# EAGLE board square Rev1 (EAGLE 9.0.1)
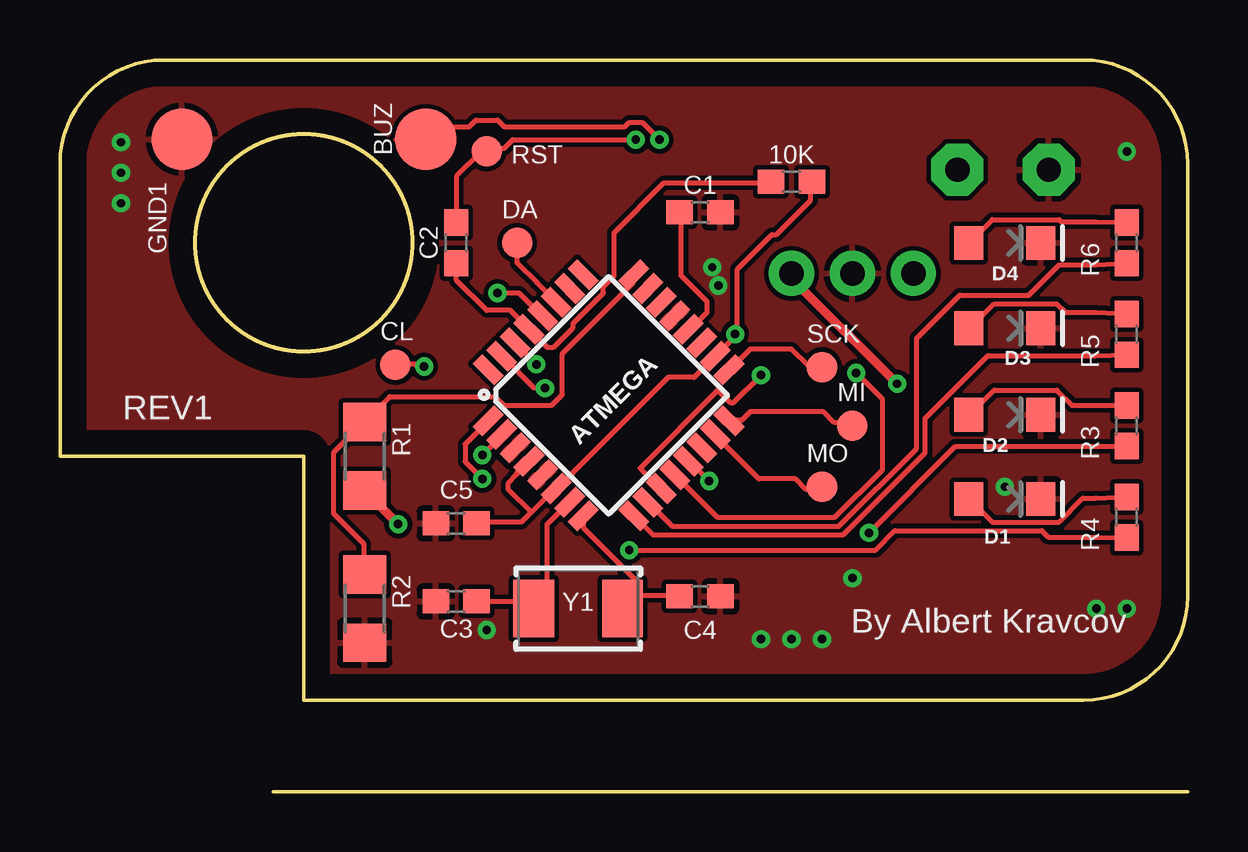
[diagram p0: board, top side]
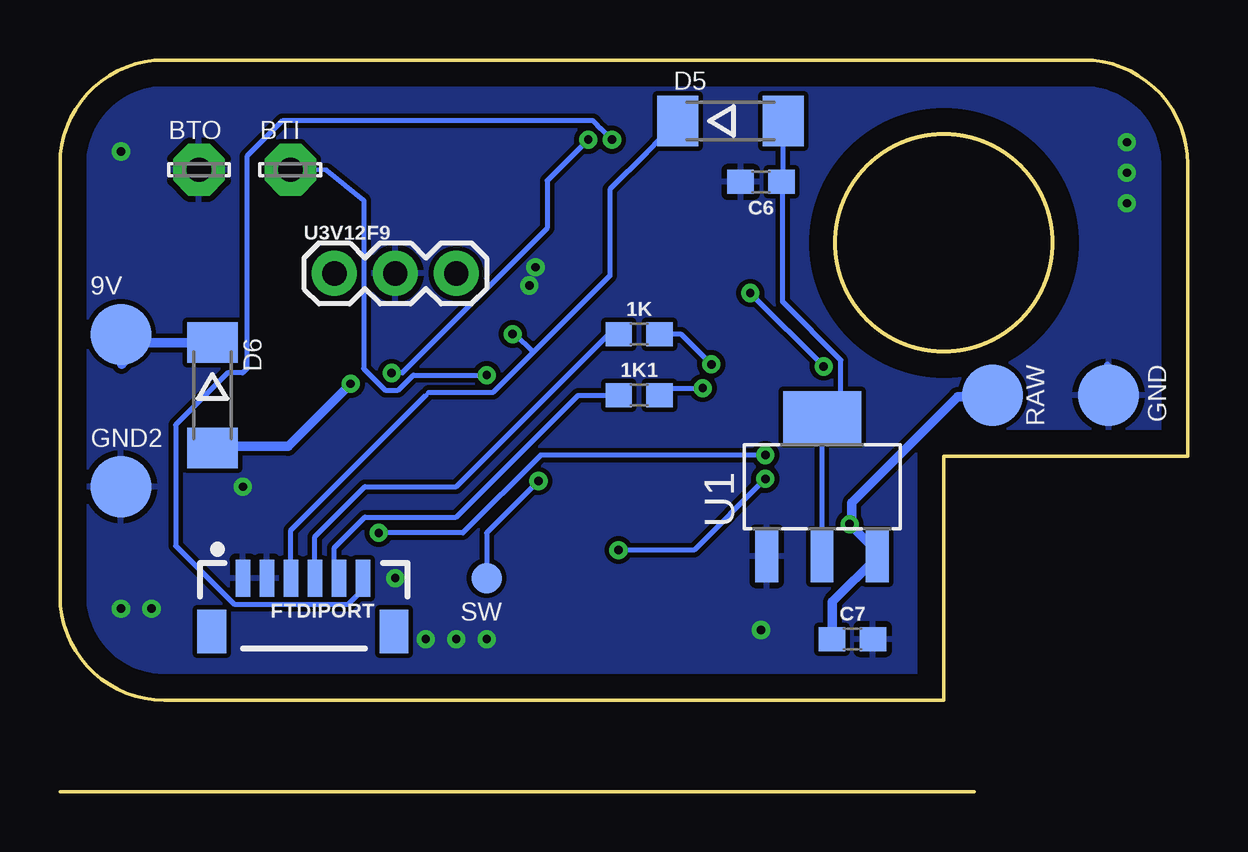
[diagram p1: board, bottom side, seen from below]

Size 46.99 x 30.48 mm. Coordinates in mm from the lower left corner, seen from the top.
Outline: 0,13.97 0,26.14 arc-90 4.34,30.48 42.65,30.48 arc-90 46.99,26.14 46.99,8.15 arc-90 42.65,3.81 10.16,3.81 10.16,13.97 0,13.97
Outline: circle at 10.16,22.86 radius 4.52
Copper layers (1*16): Top 0.035mm / dielectric 1.5mm / Bottom 0.035mm
Design rules "default *": minimum track width 6mil, minimum drill 0.35mm, track to track 6mil, track to pad 6mil, pad to pad 6mil, via to via 6mil, smd to smd 6mil, copper to edge 40mil, drill to drill 6mil, minimum pad ring 10mil, minimum via ring 8mil, stop-mask expansion 4mil, vias tented up to drill 2mm, thermal gap 10mil
Net classes: 0 default: width 0.2 mm, drill 0.254 mm, clearance 0.16 mm; 1 power: width 0.2 mm, drill 0.254 mm, clearance 0.2 mm; 2 9v: width 0.4 mm, drill 0.254 mm, clearance 0.3 mm

## Footprints (pad centres in the part's own frame; a part is rotated, then mirrored left to right if it is on the bottom)
0603 = smd 1.1 x 1: 1 -0.85,0; 2 0.85,0
B2,54 = smd 2.54 x 2.54: TP 0,0
TQFP32-08 = smd 1.27 x 0.559: 1 -4.293,2.8; 2 -4.293,2; 3 -4.293,1.2; 4 -4.293,0.4; 5 -4.293,-0.4; 6 -4.293,-1.2; 7 -4.293,-2; 8 -4.293,-2.8; 17 4.293,-2.8; 18 4.293,-2; 19 4.293,-1.2; 20 4.293,-0.4; 21 4.293,0.4; 22 4.293,1.2; 23 4.293,2; 24 4.293,2.8 | smd 0.559 x 1.27: 9 -2.8,-4.293; 10 -2,-4.293; 11 -1.2,-4.293; 12 -0.4,-4.293; 13 0.4,-4.293; 14 1.2,-4.293; 15 2,-4.293; 16 2.8,-4.293; 25 2.8,4.293; 26 2,4.293; 27 1.2,4.293; 28 0.4,4.293; 29 -0.4,4.293; 30 -1.2,4.293; 31 -2,4.293; 32 -2.8,4.293
LSP10 = drill 1.016 pad 2.159 octagon: MP 0,0
B1,27 = smd 1.27 x 1.27: TP 0,0
LED-1206 = smd 1.2 x 1.4: A -1.5,0; C 1.5,0
SOD106A-R = smd 1.7 x 2.1: A 2.2,0; C -2.2,0
1X06-1MM = smd 0.6 x 1.55: 1 -2.54,1.27; 2 -1.54,1.27; 3 -0.54,1.27; 4 0.46,1.27; 5 1.46,1.27; 6 2.46,1.27 | smd 1.2 x 1.8: P$1 -3.84,-0.955; P$2 3.76,-0.955
R1206 = smd 1.6 x 1.803: 1 -1.422,0; 2 1.422,0
SOT223 = smd 0.95 x 2.15: 1 -2.3,-2.9; 2 0,-2.9; 3 2.3,-2.9 | smd 3.25 x 2.15: 4 0,2.9
1X03 = drill 1.016 pad 1.88: 1 0,0; 2 2.54,0; 3 5.08,0
CRYSTAL-SMD-5X3.2-2PAD = smd 1.7 x 2.4: P$1 1.85,0; P$2 -1.85,0

## Placement (x,y rotation side)
1K  [0603]  22.86,19.05 0 bottom
1K1  [0603]  22.86,16.51 0 bottom
9V  TPB2,54  [B2,54]  44.45,19.05 0 bottom
10K  [0603]  30.48,25.4 0 top
ATMEGA  ATMEGA328P_TQFP  [TQFP32-08]  22.86,16.51 45 top
BTI  LSP10  [LSP10]  37.39,25.91 0 bottom
BTO  LSP10  [LSP10]  41.2,25.91 0 bottom
BUZ  TPB2,54  [B2,54]  15.24,27.18 90 top
C1  100nF  [0603]  26.67,24.13 0 top
C2  0.1uF  [0603]  16.51,22.86 90 top
C3  18pF  [0603]  16.51,7.92 180 top
C4  18pF  [0603]  26.67,8.13 0 top
C5  100nF  [0603]  16.51,11.18 180 top
C6  18pF  [0603]  17.78,25.4 180 bottom
C7  18pF  [0603]  13.97,6.35 0 bottom
CL  TPB1,27  [B1,27]  13.97,17.78 0 top
D1  [LED-1206]  39.37,12.19 0 top
D2  [LED-1206]  39.37,15.7 0 top
D3  [LED-1206]  39.37,19.3 0 top
D4  [LED-1206]  39.37,22.86 0 top
D5  [SOD106A-R]  19.05,27.94 0 bottom
D6  [SOD106A-R]  40.64,16.51 270 bottom
DA  TPB1,27  [B1,27]  19.05,22.86 0 top
FTDIPORT  [1X06-1MM]  36.83,7.62 0 bottom
GND  TPB2,54  [B2,54]  3.3,16.51 0 bottom
GND1  TPB2,54  [B2,54]  5.08,27.18 180 top
GND2  TPB2,54  [B2,54]  44.45,12.7 0 bottom
MI  TPB1,27  [B1,27]  33.02,15.24 0 top
MO  TPB1,27  [B1,27]  31.75,12.7 0 top
R1  [R1206]  12.7,13.97 90 top
R2  [R1206]  12.7,7.62 270 top
R3  0.05  [0603]  44.45,15.24 90 top
R4  0.05  [0603]  44.45,11.43 90 top
R5  0.05  [0603]  44.45,19.05 90 top
R6  0.05  [0603]  44.45,22.86 90 top
RAW  TPB2,54  [B2,54]  8.13,16.51 180 bottom
RST  TPB1,27  [B1,27]  17.78,26.67 270 top
SCK  TPB1,27  [B1,27]  31.75,17.68 0 top
SW  TPB1,27  [B1,27]  29.21,8.89 180 bottom
U1  LM1117MP-5.0  [SOT223]  15.24,12.7 0 bottom
U3V12F9  [1X03]  35.56,21.59 0 bottom
Y1  16MHz  [CRYSTAL-SMD-5X3.2-2PAD]  21.59,7.62 180 top

## Library data of the parts
1K 1K1 10K = SparkFun-Resistors; PROD_ID: RES-08787
9V BUZ CL DA GND GND1 GND2 MI MO RAW RST SW = testpad
ATMEGA = SparkFun-IC-Microcontroller; PROD_ID: IC-09069
BTI BTO = solpad
C1-C7 = SparkFun-Capacitors; PROD_ID: CAP-00867
D1-D4 = SparkFun-LED
D5 D6 = diode
FTDIPORT = SparkFun-Connectors; PROD_ID: CONN-08249; SF_ID: GPS-00579
R1 R2 = Clean-Kong
R3-R6 = SparkFun-Resistors; PROD_ID: RES-12535
SCK = testpad; TP_SIGNAL_NAME: SCK
U1 = lm1117_10; MF: Texas Instruments; MPN: LM1117MP-5.0; OC_FARNELL: 9778209; OC_NEWARK: 28X3417
U3V12F9 = SparkFun-Connectors
Y1 = SparkFun-Clocks

## Nets
5V [power]: C6.1 D5.A U1.2 U1.4
5V_PROTECTED [power]: 10K.2 ATMEGA.4 ATMEGA.6 ATMEGA.18 C5.1 D5.C FTDIPORT.3
9VOUT [9v]: D6.A U3V12F9.3
AREF: ATMEGA.20 C1.1
BUTTON: ATMEGA.11 BTI.MP
BUZZER: ATMEGA.12 BUZ.TP
DTR: C2.2 FTDIPORT.6 RST.TP
GND [power]: ATMEGA.3 ATMEGA.5 ATMEGA.21 BTO.MP C1.2 C3.2 C4.2 C5.2 C6.2 C7.2 D1.C D2.C D3.C D4.C FTDIPORT.1 FTDIPORT.2 GND1.TP GND2.TP GND.TP R2.2 U1.1 U3V12F9.2
GREEN1: D2.A R3.2
GREEN2: D3.A R5.2
GREEN3: D4.A R6.2
LED1: ATMEGA.1 R4.1
LED2: ATMEGA.2 R3.1
LED3: ATMEGA.9 R5.1
LED4: ATMEGA.10 R6.1
MI: ATMEGA.16 MI.TP
MO: ATMEGA.15 MO.TP
N$1: 1K1.1 FTDIPORT.5
N$2: ATMEGA.13 SW.TP
N$3: 1K.1 FTDIPORT.4
N$21 [9v]: 9V.TP D6.C
RAW [9v]: C7.1 R1.1 RAW.TP U1.3
RED: D1.A R4.2
RESET: 10K.1 ATMEGA.29 C2.1
RXD: 1K.2 ATMEGA.30
SCK: ATMEGA.17 SCK.TP
SCL: ATMEGA.28 CL.TP
SDA: ATMEGA.27 DA.TP
TXD: 1K1.2 ATMEGA.31
VOLTSENS: ATMEGA.24 R1.2 R2.1
XTAL1: ATMEGA.7 C3.1 Y1.P$1
XTAL2: ATMEGA.8 C4.1 Y1.P$2

## Tracks (layer width: path | path; a pad name or v marks a point on that pad's centre or on a via)
5V
  Bottom 0.2: D5.A 16.88,27.88 16.88,25.45 C6.1 16.88,25.36 16.88,20.41 14.45,17.98 14.45,16.36 15.17,15.64 U1.4 15.26,15.55 15.26,9.88 U1.2
5V_PROTECTED  (via drill 0.35)
  Top 0.2: 19.62,11.64 20.66,12.67 ATMEGA.6 20.75,12.67 25.34,17.26 26.42,17.26 27.23,18.07 ATMEGA.18 27.32,18.16 28.22,19.06 | 19.62,11.64 19.22,11.23 17.42,11.23 C5.1 | 19.62,11.64 18.68,12.58 18.68,12.85 19.04,13.21 19.04,13.3 19.49,13.75 ATMEGA.4 | 28.22,19.06 28.22,21.76 29.66,23.2 29.84,23.2 31.28,24.64 31.28,25.36 10K.2 | v28.13,19.06 28.22,19.06
  Bottom 0.152: 31.75,16.51 31.63,16.63
  Bottom 0.2: 31.47,16.63 28.94,16.63 27.27,18.3 | 27.27,18.3 24.08,21.49 24.08,25.09 22.55,26.62 D5.C | 37.31,8.89 FTDIPORT.3 | v28.13,19.06 28.04,19.06 27.27,18.3
  Bottom 0.203: FTDIPORT.3 37.37,10.89 31.75,16.51 | 31.63,16.63 31.47,16.63
9VOUT  (via drill 0.35)
  Top 0.4: v34.88,16.99 30.56,21.31 30.56,21.58 U3V12F9.3
  Bottom 0.4: v34.88,16.99 37.49,14.38 40.64,14.38 D6.A
AREF
  Top 0.2: C1.1 25.88,24.1 25.88,21.49 26.96,20.41 26.96,19.96 26.24,19.24 ATMEGA.20
BUTTON  (via drill 0.35)
  Top 0.2: v29.21,17.35 28.04,16.18 27.95,16.18 27.41,16.72 24.17,13.48 24.98,12.67 ATMEGA.11
  Bottom 0.2: v29.21,17.35 32.27,17.35 32.9,16.72 33.44,16.72 34.34,17.62 34.34,24.64 35.88,25.89 BTI.MP
BUZZER  (via drill 0.35)
  Top 0.2: v33.17,17.44 34.25,16.36 34.25,13.39 32.27,11.41 27.41,11.41 25.7,13.12 ATMEGA.12 | v24.98,27.16 24.26,27.88 23.72,27.88 23.54,27.7 18.5,27.7 18.23,27.97 17.33,27.97 17.06,27.7 15.8,27.7 15.17,27.07 14.09,27.07 14,27.16 BUZ.TP
  Bottom 0.2: v33.17,17.44 32.72,17.44 26.69,23.47 26.69,25.45 v24.98,27.16
DTR  (via drill 0.35)
  Top 0.2: C2.2 16.52,23.74 16.52,25.63 17.51,26.62 17.78,26.62 RST.TP 17.87,26.71 18.32,26.71 18.41,26.8 18.5,26.8 18.86,27.16 v23.99,27.16
  Bottom 0.152: 24.45,27.62 24.77,27.94
  Bottom 0.2: 39.2,17.62 39.38,17.44 40.01,17.44 42.17,15.28 42.17,10.24 39.74,7.81 34.97,7.81 34.43,8.35 34.43,8.89 FTDIPORT.6 | v23.99,27.16 24.45,27.62 24.71,27.88
  Bottom 0.203: 24.77,27.94 37.73,27.94 39.2,26.46 39.2,17.62
GND  (via drill 0.35)
  Bottom 0.2: GND.TP 3.32,17.8 3.38,17.8
  other vias: 39.37,12.7 43.18,7.62 33.02,8.89 17.78,6.73 2.54,27.05 2.54,24.51 2.54,25.78 27.18,21.84 27.43,21.08 44.45,7.62 31.75,6.35 30.48,6.35 44.45,26.67 29.21,6.35
  pour Top: -5.08,31.75 53.34,33.02 53.34,-2.54 -5.08,-5.08
  pour Bottom: -3.81,-2.54 -3.81,40.64 50.8,40.64 50.8,-2.54
GREEN1
  Top 0.2: R3.2 42.17,16.09 41.54,16.72 38.93,16.72 37.94,15.73 D2.A
GREEN2
  Top 0.2: R5.2 43.16,19.96 41.9,19.96 41.54,20.32 38.93,20.32 37.94,19.33 D3.A
GREEN3
  Top 0.2: D4.A 38.84,23.83 41.63,23.83 41.72,23.74 43.16,23.74 R6.2
LED1  (via drill 0.35)
  Top 0.2: v23.72,10.06 33.98,10.06 34.79,10.87 40.91,10.87 41.18,10.6 43.16,10.6 R4.1 | v17.6,13.03 16.88,13.75 16.88,14.47 17.78,15.37 ATMEGA.1
  Bottom 0.2: v23.72,10.06 20.57,10.06 v17.6,13.03
LED2  (via drill 0.35)
  Top 0.2: v33.71,10.78 37.31,14.38 43.16,14.38 R3.1 | v17.6,14.02 18.41,14.83 ATMEGA.2
  Bottom 0.2: v33.71,10.78 30.2,10.78 26.96,14.02 v17.6,14.02
LED3
  Top 0.2: R5.1 43.16,18.16 38.66,18.16 36.05,15.55 36.05,14.11 32.63,10.69 24.71,10.69 23.99,11.41 ATMEGA.9
LED4
  Top 0.2: R6.1 43.16,21.94 41.63,21.94 40.37,20.68 37.49,20.68 35.69,18.88 35.69,14.29 32.45,11.05 25.52,11.05 24.53,12.04 ATMEGA.10
MI
  Top 0.2: ATMEGA.16 27.95,15.46 28.4,15.46 28.76,15.82 31.82,15.82 32.27,15.37 32.9,15.37 32.99,15.28 MI.TP
MO
  Top 0.2: ATMEGA.15 27.32,14.83 29.12,13.03 30.65,13.03 31.1,12.58 31.19,12.67 31.73,12.67 MO.TP
N$1
  Bottom 0.152: FTDIPORT.5 35.56,9.08
  Bottom 0.203: 35.56,9.08 35.56,10.16 34.29,11.43 30.48,11.43 25.4,16.51 1K1.1
N$2  (via drill 0.35)
  Top 0.2: v27.05,12.94 26.24,13.75 ATMEGA.13
  Bottom 0.2: SW.TP 29.21,10.78 v27.05,12.94
N$3
  Bottom 0.152: FTDIPORT.4 36.37,9.24
  Bottom 0.203: 1K.1 24.13,19.05 30.48,12.7 34.29,12.7 36.37,10.62 FTDIPORT.4
N$21
  Bottom 0.152: 9V.TP 44.42,19.02 44.42,17.8
  Bottom 0.4: 44.42,17.8 43.52,18.7 D6.C
RAW  (via drill 0.35)
  Top 0.4: v14.09,11.14 12.74,12.49 R1.1
  Bottom 0.4: C7.1 14.81,6.37 14.81,7.9 12.92,9.79 U1.3 12.92,9.97 v14.09,11.14 14,11.32 14,12.04 9.59,16.45 8.15,16.45 RAW.TP
RED
  Top 0.2: R4.2 43.16,12.22 42.62,12.22 41.63,11.23 38.84,11.23 37.94,12.13 D1.A
RESET
  Top 0.2: C2.1 16.52,21.94 16.52,21.31 17.78,20.05 18.77,20.05 19.49,19.33 ATMEGA.29 19.58,19.24 20.3,18.52 20.57,18.52 21.38,19.33 21.38,19.51 22.64,20.77 22.64,21.04 23.09,21.49 23.09,23.29 25.16,25.36 29.57,25.36 10K.1
RXD  (via drill 0.35)
  Top 0.152: ATMEGA.30 19.04,18.63 19.04,18.61
  Top 0.2: v19.85,17.8 19.04,18.61 ATMEGA.30
  Bottom 0.203: v19.85,17.8 21.1,19.05 1K.2
SCK
  Top 0.2: ATMEGA.17 27.95,17.62 28.76,18.43 30.47,18.43 31.19,17.71 31.73,17.71 SCK.TP
SCL  (via drill 0.35)
  Top 0.2: v15.17,17.71 15.08,17.62 14.99,17.62 14.81,17.8 14,17.8 CL.TP | v18.23,20.77 19.13,20.77 20.03,19.87 ATMEGA.28
  Bottom 0.2: v18.23,20.77 v15.17,17.71
SDA
  Top 0.2: 19.85,21.22 19.9,21.17 20.66,20.41 ATMEGA.27
  Top 0.203: 19.9,21.17 19.05,22.02 DA.TP
TXD  (via drill 0.35)
  Top 0.152: ATMEGA.31 18.47,18.07 18.5,18.07
  Top 0.2: v20.21,16.81 19.76,16.81 18.5,18.07 ATMEGA.31
  Bottom 0.203: 1K1.2 21.71,16.81 v20.21,16.81
VOLTSENS
  Top 0.2: ATMEGA.24 23.9,21.49 23.9,21.22 20.93,18.25 20.93,16.54 20.48,16.09 18.5,16.09 18.14,16.45 13.73,16.45 12.74,15.46 R1.2 12.65,15.37 11.39,14.11 11.39,11.59 12.65,10.33 12.65,9.07 R2.1
XTAL1
  Top 0.2: C3.1 17.42,7.9 19.4,7.9 19.67,7.63 Y1.P$1 19.49,7.9 20.3,8.71 20.3,11.14 21.2,12.04 ATMEGA.7
XTAL2
  Top 0.2: C4.1 25.79,8.17 23.99,8.17 Y1.P$2 23.99,8.26 23.99,8.8 21.83,10.96 21.83,11.41 ATMEGA.8

## Text on the board
tPlace: REV1 | By Albert Kravcov